# Altium PCB MiniRobot.PcbDoc
Units mm, origin at the board's own origin, x right, y up, seen from the top; angles counter-clockwise.
Board outline 90 x 85 mm, 2 copper layers (Top Layer, Bottom Layer); 55 components, 49 nets, 199 pads, 4 vias.
Unrouted connection lines stored in the file: 90.
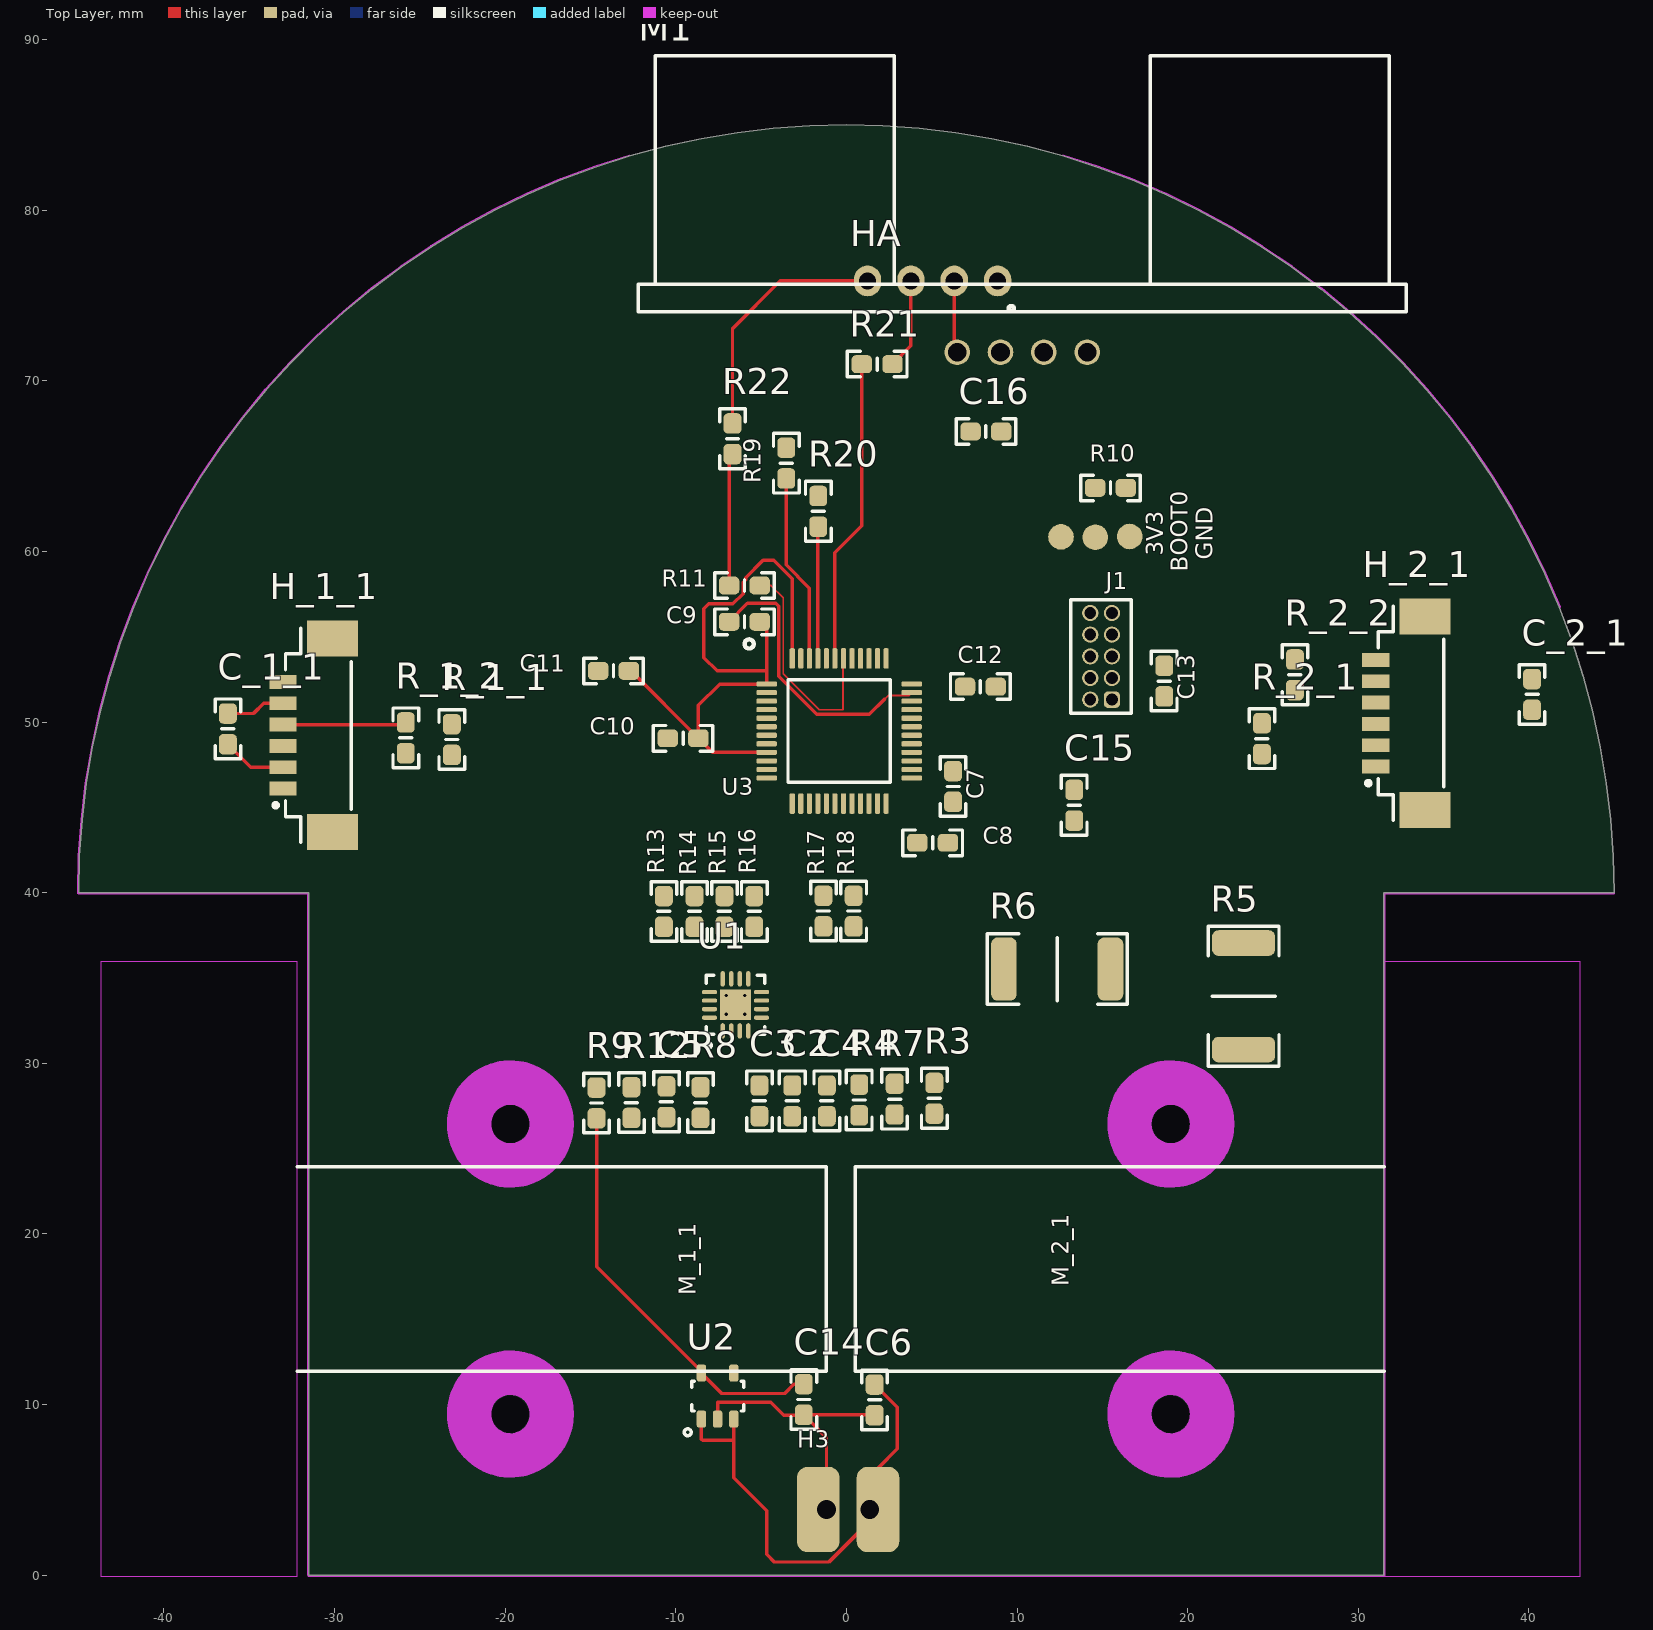
[diagram p0: Top Layer view]
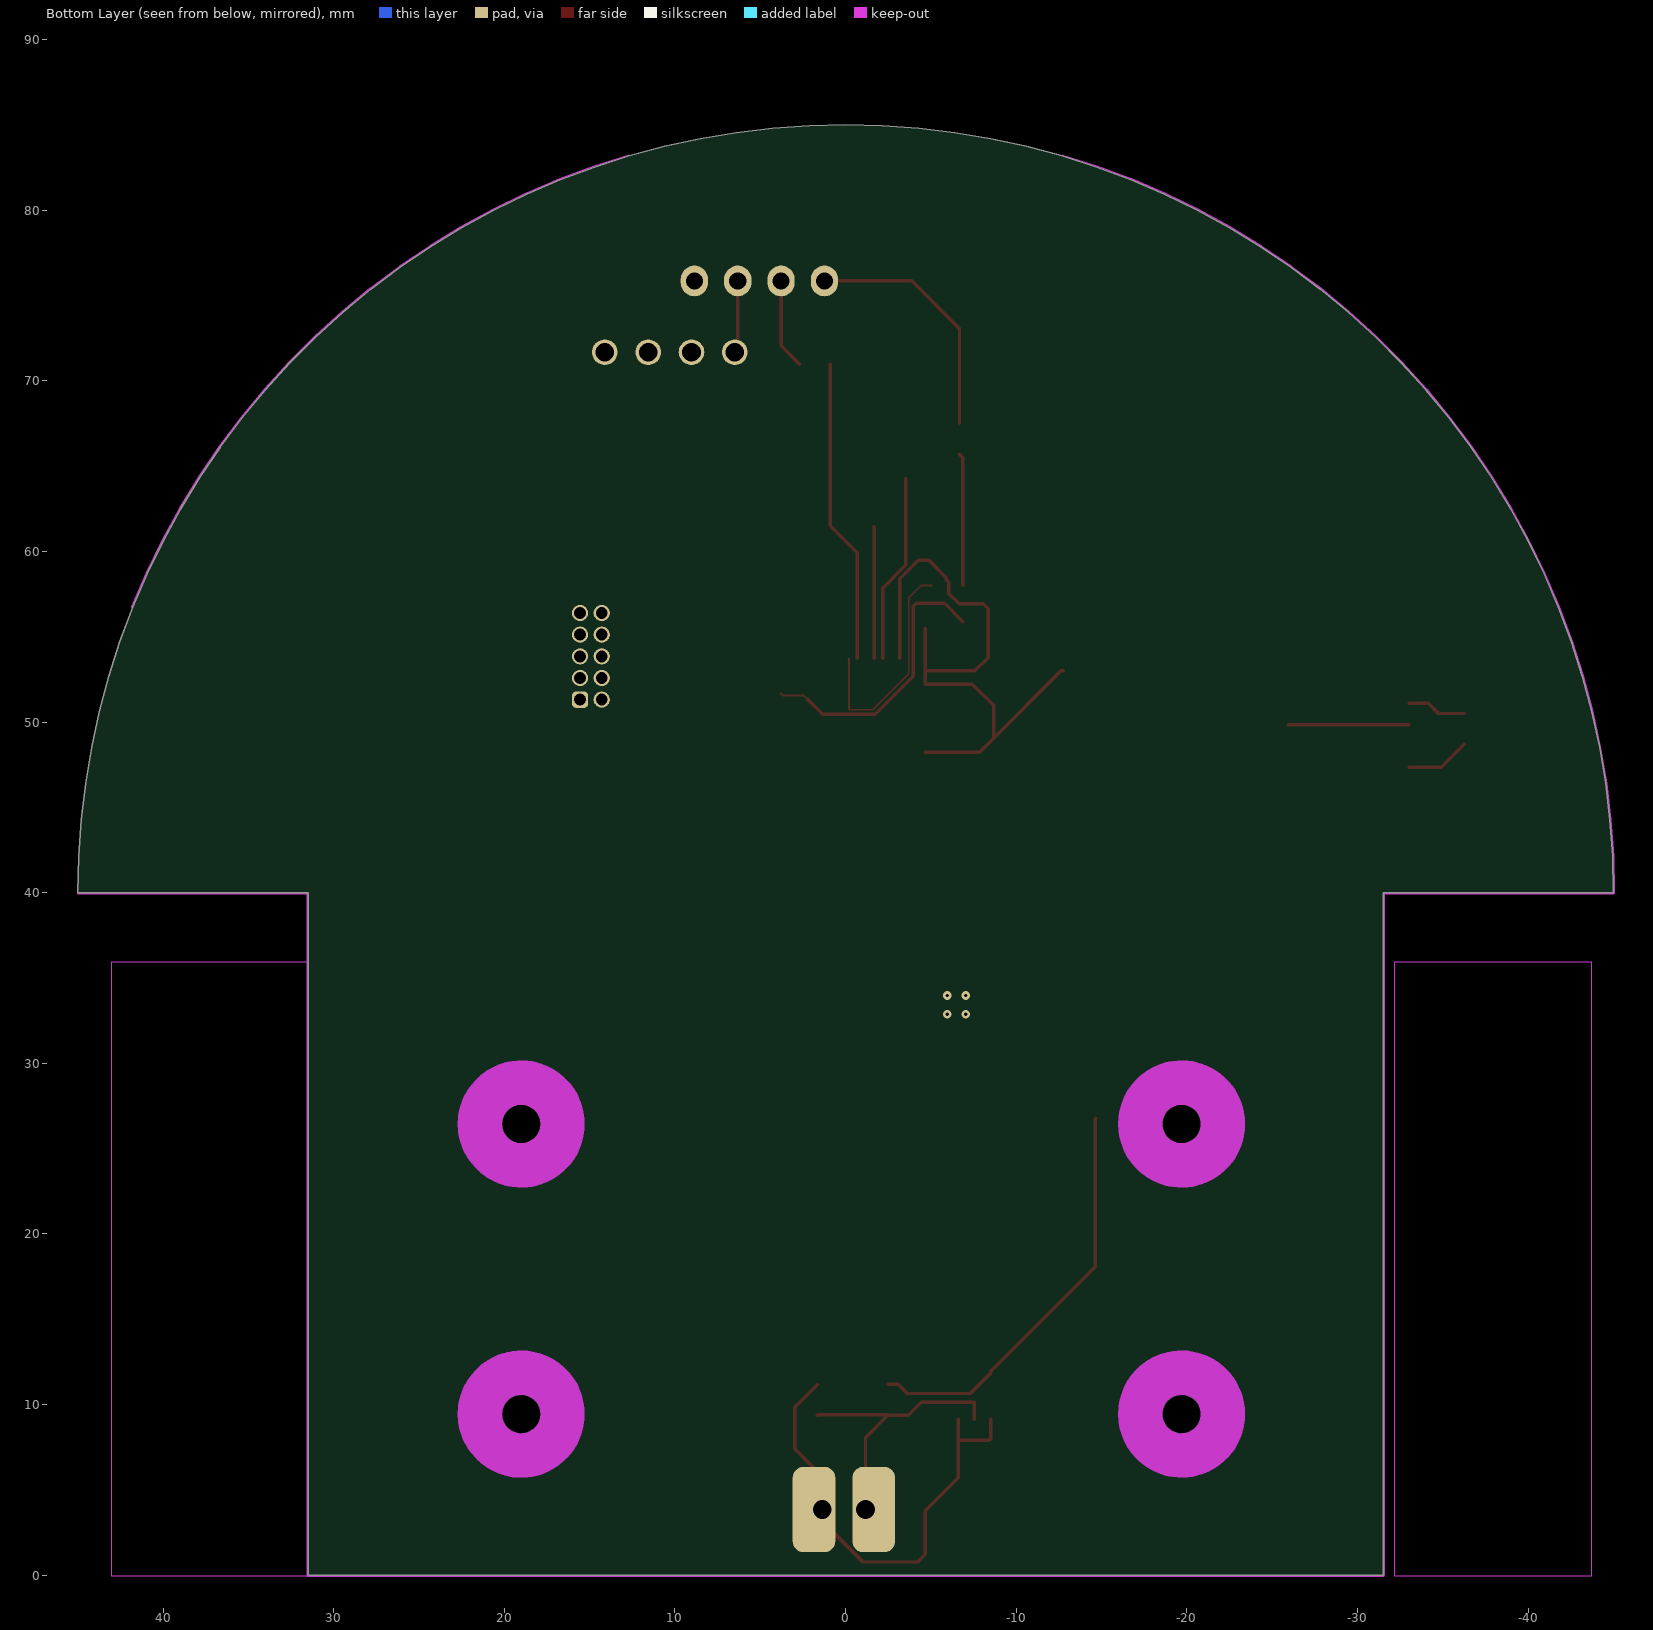
[diagram p1: Bottom Layer view, seen from below]

## Layer stack, top to bottom
Top Solder: solder mask 0.0102, Solder Resist, Dk 3.5
Top Layer: signal copper 0.0356
Dielectric 1: dielectric 0.32, FR-4, Dk 4.8
Bottom Layer: signal copper 0.0356
Bottom Solder: solder mask 0.0102, Solder Resist, Dk 3.5

## Board outline
45,40 44.949,42.141 44.796,44.278 44.542,46.404 44.187,48.516 43.732,50.609 43.177,52.678 42.525,54.718 41.777,56.725 40.933,58.694 39.998,60.62 38.971,62.5 37.856,64.329 36.656,66.103 35.372,67.817 34.009,69.469 32.568,71.054 31.054,72.568 29.469,74.009 27.817,75.372 26.103,76.656 24.329,77.856 22.5,78.971 20.62,79.998 18.694,80.933 16.725,81.777 14.718,82.525 12.678,83.177 10.609,83.732 8.516,84.187 6.404,84.542 4.278,84.796 2.141,84.949 0,85 -2.141,84.949 -4.278,84.796 -6.404,84.542 -8.516,84.187 -10.609,83.732 -12.678,83.177 -14.718,82.525 -16.725,81.777 -18.694,80.933 -20.62,79.998 -22.5,78.971 -24.329,77.856 -26.103,76.656 -27.817,75.372 -29.469,74.009 -31.054,72.568 -32.568,71.054 -34.009,69.469 -35.372,67.817 -36.656,66.103 -37.856,64.329 -38.971,62.5 -39.998,60.62 -40.933,58.694 -41.777,56.725 -42.525,54.718 -43.177,52.678 -43.732,50.609 -44.187,48.516 -44.542,46.404 -44.796,44.278 -44.949,42.141 -45,40 -31.5,40 -31.5,0 31.5,0 31.5,40

## Design rules (kind name [scope] priority, off if disabled: settings)
Clearance [All] p1: gap=0.125
ComponentClearance [All] p1 off: gap=0.254 collisioncheckmode=3 verticalgap=0.254 showdistances=FALSE
HoleSize [All] p1: absolutevalues=TRUE maxlimit=10 minlimit=0.19 maxpercent=80.000 minpercent=20.000
MinimumAnnularRing [All] p1: minimumring=0.076
MinimumSolderMaskSliver [All] p1: minsoldermaskwidth=0.154
PolygonConnect [All] p1: connectstyle=Relief reliefconductorwidth=0.254 reliefentries=4 polygonreliefangle="45 Angle" airgapwidth=0.254
RoomDefinition U_MR_UartConnector [InComponentClass('U_MR_UartConnector')] p1: confinementstyle=ConfineIn formatcopy=TRUE lockcomponents=FALSE outline 46.142,67.855 66.368,67.855 66.368,80.855 46.142,80.855
RoomDefinition U_MR_RangeSensor [InComponentClass('U_MR_RangeSensor')] p2: confinementstyle=ConfineIn formatcopy=TRUE lockcomponents=FALSE outline 53.035,65.225 53.035,35.174 101.312,35.174 101.312,65.225
RoomDefinition U_MR_Power [InComponentClass('U_MR_Power')] p3: confinementstyle=ConfineIn formatcopy=TRUE lockcomponents=FALSE outline 48.917,8.552 64.143,8.552 64.143,15.077 48.917,15.077
RoomDefinition U_MR_Motor_Control [InComponentClass('U_MR_Motor_Control')] p4: confinementstyle=ConfineIn formatcopy=TRUE lockcomponents=FALSE outline 47.992,-5.099 113.67,-5.099 113.67,2.727 47.992,2.727
RoomDefinition RightMotor [InComponentClass('RightMotor')] p5: confinementstyle=ConfineIn formatcopy=TRUE lockcomponents=FALSE outline 45.65,100.324 78.702,100.324 78.702,117.3 45.65,117.3
RoomDefinition LeftMotor [InComponentClass('LeftMotor')] p6: confinementstyle=ConfineIn formatcopy=TRUE lockcomponents=FALSE outline 45.95,82.074 77.977,82.074 77.977,99.05 45.95,99.05
RoutingVias [All] p1: holewidth=0.25 width=0.6 viastyle="Through Hole" minholewidth=0.2 minwidth=0.45 maxholewidth=1 maxwidth=2
SilkToSilkClearance [All] p1: silktosilkclearance=0.154
SilkToSolderMaskClearance [IsPad] p1: minsilkscreentomaskgap=0 clearancetoexposedcopper=TRUE
SolderMaskExpansion SolderMask_Via [IsVia] p1: expansion=-100
SolderMaskExpansion [All] p2: expansion=0.102
Width [All] p1: maxlimit=10 minlimit=0.075 preferedwidth=0.2 minimp=50.000000 maximp=50.000000 favimp=50.000000
24 further rules are at their usual default settings.

## Classes and differential pairs
component class U_MR_UartConnector: C16 HA R21 R22
component class U_MR_RangeSensor: C15 M1 R20
component class U_MR_Motor_Control: C2 C3 C4 C5 R3 R4 R5 R6 R7 R8 R9 R12 U1
channel class MR_Motor: LeftMotor RightMotor
component class U_MR_Power: C6 C14 H3 U2
component class RightMotor: C_2_1 H_2_1 M_2_1 R_2_1 R_2_2
component class LeftMotor: C_1_1 H_1_1 M_1_1 R_1_1 R_1_2
component class U_MR_Mcu: 3V3 BOOT0 C7 C8 C9 C10 C11 C12 C13 GND J1 R10 R11 R13 R14 R15 R16 R17 R18 R19 U3

## Components (designator, comment, footprint, x,y, rotation, side; value= is the part's Value field where it differs from the comment)
3V3 "TestPoint" ROUND_TEST_POINT 12.575,60.85 r180 top
BOOT0 "TestPoint" ROUND_TEST_POINT 14.588,60.825 r270 top
C2 "CerCap" 0603_CAP_LD -3.175,27.8 r90 top
C3 "CerCap" 0603_CAP_LD -5.1,27.8 r270 top
C4 "CerCap" 0603_CAP_LD -1.15,27.8 r270 top
C5 "CerCap" 0603_CAP_LD -10.55,27.75 r90 top
C6 "CerCap" 0603_CAP_LD 1.65,10.275 r90 top
C7 "CerCap" 0603_CAP_LD 6.25,46.225 r270 top
C8 "CerCap" 0603_CAP_LD 5.05,42.925 r180 top
C9 "CerCap" 0603_CAP_LD -5.975,55.875 r0 top
C10 "CerCap" 0603_CAP_LD -9.575,49.05 r0 top
C11 "CerCap" 0603_CAP_LD -13.65,53 r0 top
C12 "CerCap" 0603_CAP_LD 7.85,52.075 r180 top
C13 "CerCap" 0603_CAP_LD 18.625,52.4 r270 top
C14 "CerCap" 0603_CAP_LD -2.5,10.3 r90 top
C15 "CerCap" 0603_CAP_LD 13.35,45.125 r90 top
C16 "CerCap" 0603_CAP_LD 8.175,67.025 r0 top
C_1_1 "CerCap" 0603_CAP_LD -36.25,49.6 r90 top (schematic designator C1)
C_2_1 "CerCap" 0603_CAP_LD 40.183,51.618 r90 top (schematic designator C1)
GND "TestPoint" ROUND_TEST_POINT 16.6,60.875 r90 top
H3 "CustomBatteryConnector" CUSTOMBATTERYCONNECTOR 0.1,3.85 r180 top
H_1_1 "Header" HEADER_1X6_PICOBLADE_653106124022 -30.95,49.225 r90 top (schematic designator H1)
H_2_1 "Header" HEADER_1X6_PICOBLADE_653106124022 33.083,50.518 r90 top (schematic designator H1)
HA "Header" "HE14 1x4 Straight" 5.05,75.85 r180 top
J1 "Debug" 62201021121 14.925,53.85 r90 top
M1 "Ultrasonic Range Sensor" HC-SR04 10.3,71.675 r0 top
M_1_1 "MotorGroup" MOTORGROUP -1.192,17.944 r0 top locked (schematic designator M1)
M_2_1 "MotorGroup" MOTORGROUP 0.508,17.943 r180 top locked (schematic designator M1)
R3 "Resistor" 0603_RES_LD 5.15,27.95 r270 top
R4 "Resistor" 0603_RES_LD 0.75,27.85 r270 top
R5 "Resistor" 2512_RES_LD 23.275,33.925 r270 top
R6 "Resistor" 2512_RES_LD 12.35,35.525 r180 top
R7 "Resistor" 0603_RES_LD 2.825,27.9 r270 top
R8 "Resistor" 0603_RES_LD -8.55,27.7 r90 top
R9 "Resistor" 0603_RES_LD -14.65,27.675 r270 top
R10 "Resistor" 0603_RES_LD 15.475,63.725 r180 top
R11 "Resistor" 0603_RES_LD -5.975,58 r0 top
R12 "Resistor" 0603_RES_LD -12.6,27.7 r90 top
R13 "Resistor" 0603_RES_LD -10.7,38.9 r90 top
R14 "Resistor" 0603_RES_LD -8.9,38.9 r90 top
R15 "Resistor" 0603_RES_LD -7.15,38.9 r90 top
R16 "Resistor" 0603_RES_LD -5.4,38.9 r90 top
R17 "Resistor" 0603_RES_LD -1.35,38.925 r90 top
R18 "Resistor" 0603_RES_LD 0.425,38.925 r90 top
R19 "Resistor" 0603_RES_LD -3.525,65.175 r270 top
R20 "Resistor" 0603_RES_LD -1.65,62.35 r90 top
R21 "Resistor" 0603_RES_LD 1.8,70.975 r0 top
R22 "Resistor" 0603_RES_LD -6.675,66.6 r90 top
R_1_1 "Resistor" 0603_RES_LD -23.125,48.975 r90 top (schematic designator R1)
R_1_2 "Resistor" 0603_RES_LD -25.825,49.075 r90 top (schematic designator R2)
R_2_1 "Resistor" 0603_RES_LD 24.35,49.025 r90 top (schematic designator R1)
R_2_2 "Resistor" 0603_RES_LD 26.283,52.768 r270 top (schematic designator R2)
U1 "Dual Brush Motor Driver" QFN-STSPIN240 -6.5,33.425 r90 top
U2 "Low noise, Low Iq LDO" LP5907 -7.55,10.5 r90 top
U3 "Microcontroller" STM32_LQFP48 -0.425,49.475 r0 top

## Footprints (in the part's own frame and the unit in brackets; to place one, negate y for a bottom-side part, rotate by r counter-clockwise, add the part's x,y. Pads: shape width x height; smd on the part's side, far side on the other; paste and mask are expansions set on the pad)
0603_CAP_LD [mm] "0603 Capacitor Low Density"
  rrect50% 1.2x1.05 smd: 1(-0.9,0) 2(0.9,0)
  silkscreen extent -1.75,-0.75 1.75,0.75, body extent -0.85,-0.45 0.85,0.45, height 0.55
0603_RES_LD [mm] "0603 Resistor Low Density"
  rrect50% 1.2x1.05 smd: 1(-0.9,0) 2(0.9,0)
  silkscreen extent -1.75,-0.75 1.75,0.75, body extent -0.85,-0.45 0.85,0.45, height 0.55
2512_RES_LD [mm] "2512 Low Density Resistor"
  rrect50% 1.5x3.7 smd: 1(-3.125,0) 2(3.125,0)
  silkscreen extent -4.1,-2.07 4.1,2.07
62201021121 [mm] "Pin Header, pitch 1.27 mm, THT, Vertical, dual row, 10p"
  rrect50% 0.95x0.95 hole 0.7: 1(-2.54,-0.635)
  round 0.95 hole 0.7: 2(-2.54,0.635) 3(-1.27,-0.635) 4(-1.27,0.635) 5(0,-0.635) 6(0,0.635) 7(1.27,-0.635) 8(1.27,0.635) 9(2.54,-0.635) 10(2.54,0.635)
  silkscreen extent -3.32,-1.78 3.32,1.78, body extent -3.17,-1.7 3.18,1.7, height 5.33
CUSTOMBATTERYCONNECTOR [mm] "CustomBatteryConnector"
  rrect50% 2.5x5 smd paste-100: +(-1.75,0) -(1.75,0)
  rrect50% 2.5x5 smd far side paste-100: +(-1.75,0) -(1.75,0)
  round 1.5 hole 1.1 unplated paste-100: +(-1.27,0) -(1.27,0)
HC-SR04 [mm] "HC-SR04"
  round 1.5 hole 1.1 unplated: 1(-3.81,0) 2(-1.27,0) 3(1.27,0) 4(3.81,0)
  silkscreen extent -22.5,2.38 22.5,17.38, body extent -22.72,-0.3 22.72,17.49, height 20
"HE14 1x4 Straight" [mm] "Connector HE14 Straight 1x4"
  oval 1.6x1.8 hole 1 mask+0.102: 1(-3.81,0) 2(-1.27,0) 3(1.27,0) 4(3.81,0)
  silkscreen extent -4.77,1.47 -4.45,1.78, body extent -5.08,-1.27 5.08,1.27, height 9.5
HEADER_1X6_PICOBLADE_653106124022 [mm] "1.25mm SMT Male Vertical Shrouded Header, 6p"
  rect 0.81x1.6 smd: 1(-3.125,2.07) 2(-1.875,2.07) 3(-0.625,2.07) 4(0.625,2.07) 5(1.875,2.07) 6(3.125,2.07)
  rect 2.1x3 smd: ""(-5.675,-0.83) ""(5.675,-0.83)
  silkscreen extent -6.27,-1.92 6.27,2.62, body extent -6.22,-1.85 6.22,2.35, height 4.74
LP5907 [mm] "LP5907 SOT23"
  rrect50% 1x0.55 smd mask+0.102: 1(-1.35,0.95) 2(-1.35,0) 3(-1.35,-0.95) 4(1.35,-0.95) 5(1.35,0.95)
  silkscreen extent -2.33,-1.52 0.88,1.95
MOTORGROUP [mm]
  round 0 hole 2.2 unplated paste+0 mask+0: 21(-18.5,8.5) 22(-18.5,-8.5)
  Keep-Out Layer pour cut-out: -31,-18 -31,18 -42.5,18 -42.5,-18
  Keep-Out Layer circle w2.6: c-18.5,8.5 r2.425
  Keep-Out Layer circle w2.6: c-18.5,-8.5 r2.425
  silkscreen extent -31,-6 0,6
QFN-STSPIN240 [mm] "QFN, 16-Leads, Body 3,00x3,00mm, Pitch 0,50mm, Thermal Pad 1,80x1,80mm, IPC Low Density"
  oval 0.9x0.25 smd: 1(-1.525,0.75) 2(-1.525,0.25) 3(-1.525,-0.25) 4(-1.525,-0.75) 9(1.525,-0.75) 10(1.525,-0.25) 11(1.525,0.25) 12(1.525,0.75)
  oval 0.25x0.9 smd: 5(-0.75,-1.525) 6(-0.25,-1.525) 7(0.25,-1.525) 8(0.75,-1.525) 13(0.75,1.525) 14(0.25,1.525) 15(-0.25,1.525) 16(-0.75,1.525)
  rect 1.8x1.8 smd: 17(0,0)
  silkscreen extent -2.5,-1.73 1.73,1.73, body extent -1.58,-1.57 1.57,1.58, height 1
ROUND_TEST_POINT [mm] "Small round test point"
  round 1.5 smd paste-100: 1(0,0)
STM32_LQFP48 [mm]
  rrect50% 1.2x0.3 smd: 1(-4.25,2.75) 2(-4.25,2.25) 3(-4.25,1.75) 4(-4.25,1.25) 5(-4.25,0.75) 6(-4.25,0.25) 7(-4.25,-0.25) 8(-4.25,-0.75) 9(-4.25,-1.25) 10(-4.25,-1.75) 11(-4.25,-2.25) 12(-4.25,-2.75) 25(4.25,-2.75) 26(4.25,-2.25) 27(4.25,-1.75) 28(4.25,-1.25) 29(4.25,-0.75) 30(4.25,-0.25) 31(4.25,0.25) 32(4.25,0.75) 33(4.25,1.25) 34(4.25,1.75) 35(4.25,2.25) 36(4.25,2.75)
  rrect50% 0.3x1.2 smd: 13(-2.75,-4.25) 14(-2.25,-4.25) 15(-1.75,-4.25) 16(-1.25,-4.25) 17(-0.75,-4.25) 18(-0.25,-4.25) 19(0.25,-4.25) 20(0.75,-4.25) 21(1.25,-4.25) 22(1.75,-4.25) 23(2.25,-4.25) 24(2.75,-4.25) 37(2.75,4.25) 38(2.25,4.25) 39(1.75,4.25) 40(1.25,4.25) 41(0.75,4.25) 42(0.25,4.25) 43(-0.25,4.25) 44(-0.75,4.25) 45(-1.25,4.25) 46(-1.75,4.25) 47(-2.25,4.25) 48(-2.75,4.25)
  silkscreen extent -5.54,-3 3,5.37

## Part data
C2 C3 C4 C5 C6 C7 C8 C9 C10 C11 C12 C13 C14 C15 C16 C_1_1 C_2_1: "Ceramic Capacitor"
H3: library part BatteryConnector, "Custom Battery Connector"
H_1_1 H_2_1: library part Header_6x1, "Header 6x1 Pins"
HA: library part Header_4x1, "Header 4x1 PIns"
J1: library part Cortex_10x2, "Cortex 10 pins Debug Connector"
M1: library part HC-SR04
M_1_1 M_2_1: library part Motor
U1: library part STSPIN240, "ST Dual Motor Driver"
U2: library part LP5907, "LP5907 Low Noise Low Iq LDO"
U3: library part STM32F303CBT6, "STM32F303 Microcontroller"

## Via types
v1: diameter 0.5, hole 0.2, Top Layer to Bottom Layer, 4 vias

## Nets (pads, with @x,y where several pads share a name; then routed paths per layer and width w, separated by ;. In a path a pad name is that pad's centre, name@x,y a point inside that pad or via, vN(x,y) a via of type N, cw(c..) or ccw(c..) an arc to the next point about the centre after c; other vN are vias at no path point)
3V3: 3V3.1 C7.2 C8.2 C9.2 C10.2 C11.2 C12.2 C13.2 C14.2 J1.1 M1.4 R9.2 U2.5 U3.1 U3.9 U3.24 U3.36 U3.48 | length 62.7
  Top Layer w0.2: R9.2 -14.625,26.75 -14.625,18.075 -8.5,11.95 U2.5 -7.3,10.65 -3.625,10.65 -3.075,11.2 C14.2 ; C11.2 -12.625,53 C10.2 ; U3.9 -7.85,48.225 C10.2 ; C9.2@-4.675,55.475 -4.675,53 ; U3.48 -3.175,58.4 -4.25,59.475 -4.889,59.475 -5.9,58.464 -5.9,58.35 -6.05,58.2 -6.05,57.525 -6.65,56.925 -8.075,56.925 -8.35,56.65 -8.35,53.775 -7.575,53 -4.675,53 ; C10.2 -8.675,50.975 -7.425,52.225 U3.1 -4.675,53
BOOT0: BOOT0.1 R10.2 U3.44
GND: C2.1 C3.2 C4.2 C5.1 C6.1 C7.1 C8.1 C9.1 C10.1 C11.1 C12.1 C13.1 C14.1 C15.2 C16.1 C_1_1.1 C_2_1.1 GND.1 H3.- H_1_1.2 H_2_1.2 HA.2 J1.3 J1.5 J1.9 M1.1 R5.1 R6.1 R8.1 R10.1 R12.1 U1.7 U2.2 U3.8 U3.23 U3.35 U3.47 | length 41.4
  Top Layer w0.1: 2.25,51.35 2.45,51.55 3.65,51.55 U3.35
  Top Layer w0.2: C_1_1.1 -34.9,47.35 H_1_1.2 ; U2.2 -7.55,10.125 -4.425,10.125 -3.675,9.375 -2.525,9.375 C14.1 ; C9.1 -5.8,56.95 -4.15,56.95 -3.975,56.775 -3.975,52.675 -1.75,50.45 1.35,50.45 2.25,51.35 ; H3.-@-1.17,3.85 -1.17,8.07 C14.1 ; C6.1 1.625,9.4 C14.1 ; HA.2 6.32,71.845 M1.1
NetC3_1: C3.1 R3.2 U1.13 U3.20
NetC5_2: C5.2 R7.1
NetH_1_1_1: H_1_1.1 U1.3
NetH_1_1_3: H_1_1.3 R_1_1.2
NetH_1_1_4: H_1_1.4 R_1_2.2 | length 7.1
  Top Layer w0.2: H_1_1.4 R_1_2.2@-25.95,49.85
NetH_1_1_6: H_1_1.6 U1.5
NetH_2_1_1: H_2_1.1 U1.10
NetH_2_1_3: H_2_1.3 R_2_1.2
NetH_2_1_4: H_2_1.4 R_2_2.2
NetH_2_1_6: H_2_1.6 U1.8
NetHA_3: HA.3 R21.2 | length 5.3
  Top Layer w0.2: R21.2 3.78,72.055 HA.3
NetHA_4: HA.4 R22.2 | length 14.6
  Top Layer w0.2: R22.2 -6.675,73.05 -3.875,75.85 HA.4
NetM1_2: M1.2 R20.2
NetM1_3: M1.3 R19.1
NetR3_1: R3.1 R18.1
NetR4_2: R4.2 R17.1
NetR5_2: R5.2 U1.9
NetR6_2: R6.2 U1.4
NetR7_2: R7.2 R8.2 U1.12
NetR9_1: R9.1 R12.2 U1.11
NetR11_1: R11.1 R22.1 | length 7.8
  Top Layer w0.2: R11.1 -6.875,65.5 R22.1
NetR11_2: R11.2 U3.42 | length 13.5
  Top Layer w0.1: R11.2 -4.425,58 -3.7,57.275 -3.7,52.825 -1.6,50.725 -0.2,50.725 -0.2,53.7 U3.42
NetR13_1: R13.1 U1.2
NetR13_2: R13.2 U3.12
NetR14_1: R14.1 U1.16
NetR14_2: R14.2 U3.13
NetR15_1: R15.1 U1.1
NetR15_2: R15.2 U3.14
NetR16_1: R16.1 U1.15
NetR16_2: R16.2 U3.15
NetR17_2: R17.2 U3.18
NetR18_2: R18.2 U3.19
NetR19_2: R19.2 U3.46 | length 11.1
  Top Layer w0.2: R19.2 -3.525,59.21 -2.85,58.535 -2.85,58.525 -2.175,57.85 U3.46
NetR20_1: R20.1 U3.45 | length 7.7
  Top Layer w0.2: U3.45 -1.675,61.425 R20.1
NetR21_1: R21.1 U3.43 | length 17.9
  Top Layer w0.2: U3.43 -0.675,59.925 0.9,61.5 R21.1
NetR_1_1_1: R_1_1.1 U3.10
NetR_1_2_1: R_1_2.1 U3.11
NetR_2_1_1: R_2_1.1 U3.16
NetR_2_2_1: R_2_2.1 U3.17
nRST: J1.10 U3.7
SWCLK: J1.4 U3.37
SWDIO: J1.2 U3.34
SWO: J1.6 U3.39
VBATT: C6.2 C16.2 C_1_1.2 C_2_1.2 H3.+ H_1_1.5 H_2_1.5 HA.1 U1.6 U2.1 U2.3 | length 32.2
  Top Layer w0.2: C_1_1.2 -34.75,50.5 -34.15,51.1 H_1_1.5 ; U2.1 -8.5,7.975 -8.425,7.9 -6.6,7.9 ; U2.3 -6.6,7.9 ; H3.+@1.37,3.85 H3.+@1.85,3.85 ; C6.2 2.975,9.85 2.975,7.4 1.85,6.275 H3.+@1.85,3.85 ; -6.6,7.9 -6.6,5.7 -4.675,3.775 -4.675,1.225 -4.225,0.775 -1.023,0.775 1.85,3.648 H3.+@1.85,3.85
VCC: C2.2 C15.1
VDD: C4.1 R4.1 U1.14
pads on no net: H_1_1. H_2_1. J1.7 J1.8 M_1_1.21 M_1_1.22 M_2_1.21 M_2_1.22 U1.17 U2.4 U3.2 U3.3 U3.4 U3.5 U3.6 U3.21 U3.22 U3.25 U3.26 U3.27 U3.28 U3.29 U3.30 U3.31 U3.32 U3.33 U3.38 U3.40 U3.41
copper on no net:
  other v1: -7.05,32.875 -5.95,32.875 -7.05,33.975 -5.95,33.975

## Keep-outs
Keep-Out Layer:
  lines w0.1: -12.693,83.225 -14.733,82.573 ; 12.693,83.225 14.733,82.573 ; 41.823,56.745 40.979,58.713 ; 45,39.95 31.55,39.95 31.55,0 ; -45.05,40.001 ccw(c-45,40) -45,39.95 ; -45.05,40.002 ccw(c-45,40) -45,39.95 ; -45.05,40.002 -44.999,42.142 ; -45.05,40.001 -45.05,40.002 ; -45,39.95 -31.55,39.95 -31.55,0 ; -44.999,42.142 cw(c-44.949,42.141) -44.999,42.145 ; -44.999,42.142 cw(c-44.949,42.141) -44.999,42.145 ; -44.999,42.142 -44.999,42.142 ; -44.999,42.145 -44.846,44.281 ; -44.846,44.281 cw(c-44.796,44.278) -44.846,44.283 ; -44.846,44.281 cw(c-44.796,44.278) -44.846,44.283 ; -44.846,44.283 -44.592,46.41 ; -44.592,46.41 cw(c-44.542,46.404) -44.591,46.413 ; -44.592,46.41 cw(c-44.542,46.404) -44.591,46.412 ; -44.591,46.413 -44.236,48.524 ; -44.591,46.412 -44.591,46.413 ; -44.236,48.525 cw(c-44.187,48.516) -44.236,48.527 ; -44.236,48.524 cw(c-44.187,48.516) -44.236,48.527 ; -44.236,48.524 -44.236,48.525 ; -44.236,48.527 ccw(c-44.187,48.516) -44.236,48.527 ; -44.236,48.527 -43.78,50.62 ; -44.236,48.527 -44.236,48.527 ; -44.236,48.527 -44.236,48.527 ; -43.78,50.62 cw(c-43.732,50.609) -43.78,50.622 ; -43.78,50.62 ccw(c-43.732,50.609) -43.78,50.62 ; -43.78,50.62 cw(c-43.732,50.609) -43.78,50.622 ; -43.78,50.62 -43.78,50.62 ; -43.78,50.62 -43.78,50.62 ; -43.78,50.622 ccw(c-43.732,50.609) -43.78,50.622 ; -43.78,50.622 -43.226,52.691 ; -43.78,50.622 -43.78,50.622 ; -43.78,50.622 -43.78,50.622 ; -43.226,52.691 cw(c-43.177,52.678) -43.225,52.693 ; -43.226,52.691 ccw(c-43.177,52.678) -43.226,52.691 ; -43.226,52.691 cw(c-43.177,52.678) -43.225,52.693 ; -43.226,52.691 -43.226,52.691 ; -43.226,52.691 -43.226,52.691 ; -43.225,52.693 -42.573,54.733 ; -42.573,54.733 cw(c-42.525,54.718) -42.572,54.735 ; -42.573,54.733 cw(c-42.525,54.718) -42.572,54.736 ; -42.572,54.736 ccw(c-42.525,54.718) -42.572,54.735 ; -42.572,54.736 -41.824,56.742 ; -42.572,54.736 -42.572,54.736 ; -42.572,54.735 -42.572,54.736 ; -41.823,56.742 cw(c-41.777,56.725) -41.823,56.744 ; -41.823,56.742 ccw(c-41.777,56.725) -41.823,56.742 ; -41.823,56.742 cw(c-41.777,56.725) -41.823,56.744 ; -41.823,56.742 -41.823,56.742 ; -41.824,56.742 -41.823,56.742 ; -41.823,56.744 -40.979,58.713 ; -40.979,58.713 cw(c-40.933,58.694) -40.979,58.715 ; -40.979,58.713 cw(c-40.933,58.694) -40.978,58.716 ; -40.979,58.715 cw(c-40.933,58.694) -40.978,58.716 ; -40.979,58.715 -40.978,58.716 ; -40.978,58.716 -40.043,60.642 ; -40.978,58.716 -40.978,58.716 ; -40.043,60.642 cw(c-39.998,60.62) -40.042,60.644 ; -40.043,60.642 cw(c-39.998,60.62) -40.043,60.642 ; -40.043,60.642 -40.043,60.642 ; -40.043,60.642 -40.043,60.642 ; -40.043,60.642 cw(c-39.998,60.62) -40.042,60.644 ; -40.042,60.644 -39.015,62.524 ; -39.015,62.524 cw(c-38.971,62.5) -39.014,62.526 ; -39.015,62.524 cw(c-38.971,62.5) -39.014,62.526 ; -39.014,62.526 -37.899,64.355 ; -37.899,64.355 cw(c-37.856,64.329) -37.898,64.357 ; -37.899,64.355 cw(c-37.856,64.329) -37.898,64.357 ; -37.898,64.357 -36.698,66.13 ; -37.898,64.357 -37.898,64.357 ; -36.697,66.131 cw(c-36.656,66.103) -36.696,66.133 ; -36.698,66.13 cw(c-36.656,66.103) -36.696,66.133 ; -36.698,66.13 -36.697,66.131 ; -36.696,66.133 -35.412,67.847 ; -35.412,67.847 cw(c-35.372,67.817) -35.411,67.849 ; -35.412,67.847 cw(c-35.372,67.817) -35.411,67.849 ; -35.411,67.849 -34.047,69.501 ; -34.047,69.501 cw(c-34.009,69.469) -34.046,69.502 ; -34.047,69.501 cw(c-34.009,69.469) -34.046,69.502 ; -34.046,69.503 ccw(c-34.009,69.469) -34.046,69.502 ; -34.046,69.503 -32.605,71.087 ; -34.046,69.502 -34.046,69.503 ; -34.046,69.502 -34.046,69.502 ; -32.605,71.087 cw(c-32.568,71.054) -32.603,71.089 ; -32.605,71.087 ccw(c-32.568,71.054) -32.605,71.087 ; -32.605,71.087 cw(c-32.568,71.054) -32.603,71.089 ; -32.605,71.087 -32.605,71.087 ; -32.605,71.087 -32.605,71.087 ; -32.603,71.089 -31.089,72.603 ; -31.55,0 ccw(c-31.5,0) -31.5,-0.05 ; -31.55,0 ccw(c-31.5,0) -31.5,-0.05 ; -31.5,-0.05 31.5,-0.05 ; -31.089,72.603 cw(c-31.054,72.568) -31.087,72.605 ; -31.089,72.603 cw(c-31.054,72.568) -31.087,72.605 ; -31.087,72.605 ccw(c-31.054,72.568) -31.087,72.605 ; -31.087,72.605 -29.503,74.046 ; -31.087,72.605 -31.087,72.605 ; -31.087,72.605 -31.087,72.605 ; -29.503,74.046 cw(c-29.469,74.009) -29.502,74.046 ; -29.503,74.046 -29.502,74.046 ; -29.502,74.046 cw(c-29.469,74.009) -29.501,74.047 ; -29.502,74.046 cw(c-29.469,74.009) -29.501,74.047 ; -29.502,74.046 -29.502,74.046 ; -29.501,74.047 -27.849,75.411 ; -27.849,75.411 cw(c-27.817,75.372) -27.847,75.412 ; -27.849,75.411 cw(c-27.817,75.372) -27.847,75.412 ; -27.847,75.412 -26.133,76.696 ; -26.133,76.696 cw(c-26.103,76.656) -26.13,76.698 ; -26.133,76.696 cw(c-26.103,76.656) -26.131,76.697 -26.13,76.698 ; -26.13,76.698 -24.357,77.898 ; -24.357,77.898 cw(c-24.329,77.856) -24.355,77.899 ; -24.357,77.898 cw(c-24.329,77.856) -24.355,77.899 ; -24.357,77.898 -24.357,77.898 ; -24.355,77.899 -22.526,79.014 ; -22.526,79.014 cw(c-22.5,78.971) -22.524,79.015 ; -22.526,79.014 cw(c-22.5,78.971) -22.524,79.015 ; -22.524,79.015 -20.644,80.041 ; -20.644,80.041 cw(c-20.62,79.998) -20.642,80.042 ; -20.644,80.041 cw(c-20.62,79.998) -20.642,80.043 ; -20.642,80.042 cw(c-20.62,79.998) -20.642,80.043 ; -20.642,80.043 -20.642,80.043 ; -20.642,80.042 -20.642,80.043 ; -20.642,80.043 -18.716,80.978 ; -18.716,80.978 cw(c-18.694,80.933) -18.713,80.979 ; -18.715,80.979 ccw(c-18.694,80.933) -18.716,80.978 ; -18.715,80.979 cw(c-18.694,80.933) -18.713,80.979 ; -18.716,80.978 -18.715,80.979 ; -18.716,80.978 -18.716,80.978 ; -18.713,80.979 -16.745,81.823 ; -16.745,81.823 cw(c-16.725,81.777) -16.742,81.823 ; -16.745,81.823 cw(c-16.725,81.777) -16.742,81.823 ; -16.742,81.823 cw(c-16.725,81.777) -16.742,81.823 ; -16.742,81.823 -16.742,81.823 ; -16.742,81.823 -16.742,81.823 ; -16.742,81.823 -14.736,82.572 ; -14.736,82.572 cw(c-14.718,82.525) -14.735,82.572 ; -14.736,82.572 -14.736,82.572 ; -14.736,82.572 cw(c-14.718,82.525) -14.733,82.573 ; -14.735,82.572 cw(c-14.718,82.525) -14.733,82.573 ; -14.736,82.572 -14.735,82.572 ; 14.733,82.573 cw(c14.718,82.525) 14.735,82.572 ; 14.733,82.573 cw(c14.718,82.525) 14.736,82.572 ; 14.736,82.572 ccw(c14.718,82.525) 14.735,82.572 ; 14.736,82.572 16.742,81.823 ; 14.736,82.572 14.736,82.572 ; 14.735,82.572 14.736,82.572 ; 16.742,81.823 cw(c16.725,81.777) 16.744,81.823 ; 16.742,81.823 ccw(c16.725,81.777) 16.742,81.823 ; 16.742,81.823 cw(c16.725,81.777) 16.744,81.823 ; 16.742,81.823 16.742,81.823 ; 16.742,81.823 16.742,81.823 ; 16.744,81.823 18.713,80.979 ; 18.713,80.979 cw(c18.694,80.933) 18.715,80.979 ; 18.713,80.979 cw(c18.694,80.933) 18.716,80.978 ; 18.716,80.978 ccw(c18.694,80.933) 18.715,80.979 ; 18.716,80.978 20.642,80.043 ; 18.716,80.978 18.716,80.978 ; 18.715,80.979 18.716,80.978 ; 20.642,80.042 ccw(c20.62,79.998) 20.642,80.043 ; 20.642,80.042 cw(c20.62,79.998) 20.644,80.042 ; 20.642,80.042 20.642,80.043 ; 20.642,80.043 cw(c20.62,79.998) 20.644,80.042 ; 20.642,80.043 20.642,80.043 ; 20.644,80.042 22.524,79.015 ; 22.524,79.015 cw(c22.5,78.971) 22.526,79.014 ; 22.524,79.015 cw(c22.5,78.971) 22.526,79.014 ; 22.526,79.014 24.355,77.899 ; 24.355,77.899 cw(c24.329,77.856) 24.357,77.898 ; 24.355,77.899 cw(c24.329,77.856) 24.357,77.898 ; 24.357,77.898 26.13,76.698 ; 24.357,77.898 24.357,77.898 ; 26.13,76.698 cw(c26.103,76.656) 26.133,76.696 ; 26.13,76.698 26.131,76.697 cw(c26.103,76.656) 26.133,76.696 ; 26.133,76.696 27.847,75.412 ; 27.847,75.412 cw(c27.817,75.372) 27.849,75.411 ; 27.847,75.412 cw(c27.817,75.372) 27.849,75.411 ; 27.849,75.411 29.501,74.047 ; 29.501,74.047 cw(c29.469,74.009) 29.502,74.046 ; 29.501,74.047 cw(c29.469,74.009) 29.502,74.046 ; 29.502,74.046 cw(c29.469,74.009) 29.503,74.046 ; 29.502,74.046 29.502,74.046 ; 29.503,74.046 31.087,72.605 ; 29.503,74.046 29.502,74.046 ; 31.087,72.605 cw(c31.054,72.568) 31.087,72.605 ; 31.087,72.605 31.087,72.605 ; 31.087,72.605 cw(c31.054,72.568) 31.089,72.603 ; 31.087,72.605 cw(c31.054,72.568) 31.089,72.603 ; 31.087,72.605 31.087,72.605 ; 31.089,72.603 32.603,71.089 ; 31.5,-0.05 ccw(c31.5,0) 31.55,0 ; 31.5,-0.05 ccw(c31.5,0) 31.55,0 ; 32.603,71.089 cw(c32.568,71.054) 32.605,71.087 ; 32.603,71.089 cw(c32.568,71.054) 32.605,71.087 ; 32.605,71.087 ccw(c32.568,71.054) 32.605,71.087 ; 32.605,71.087 32.605,71.087 ; 32.605,71.087 32.605,71.087 ; 32.605,71.087 34.046,69.503 ; 34.046,69.502 cw(c34.009,69.469) 34.047,69.501 ; 34.046,69.502 ccw(c34.009,69.469) 34.046,69.503 ; 34.046,69.502 cw(c34.009,69.469) 34.047,69.501 ; 34.046,69.503 34.046,69.502 ; 34.046,69.502 34.046,69.502 ; 34.047,69.501 35.411,67.849 ; 35.411,67.849 cw(c35.372,67.817) 35.412,67.847 ; 35.411,67.849 cw(c35.372,67.817) 35.412,67.847 ; 35.412,67.847 36.696,66.133 ; 36.696,66.133 cw(c36.656,66.103) 36.698,66.13 ; 36.696,66.133 cw(c36.656,66.103) 36.697,66.131 ; 36.697,66.131 36.698,66.13 ; 36.698,66.13 37.898,64.357 ; 37.898,64.357 cw(c37.856,64.329) 37.899,64.355 ; 37.898,64.357 cw(c37.856,64.329) 37.899,64.355 ; 37.898,64.357 37.898,64.357 ; 37.899,64.355 39.014,62.526 ; 39.014,62.526 cw(c38.971,62.5) 39.015,62.524 ; 39.014,62.526 cw(c38.971,62.5) 39.015,62.524 ; 39.015,62.524 40.041,60.644 ; 40.041,60.644 cw(c39.998,60.62) 40.042,60.642 ; 40.041,60.644 cw(c39.998,60.62) 40.043,60.642 ; 40.043,60.642 ccw(c39.998,60.62) 40.042,60.642 ; 40.043,60.642 40.042,60.642 ; 40.043,60.642 40.043,60.642 ; 40.043,60.642 40.978,58.716 ; 40.979,58.715 ccw(c40.933,58.694) 40.978,58.716 ; 40.979,58.715 cw(c40.933,58.694) 40.979,58.713 ; 40.979,58.715 40.978,58.716 ; 40.978,58.716 cw(c40.933,58.694) 40.979,58.713 ; 40.978,58.716 40.978,58.716

## Silkscreen, mask and mechanical layers (free items; w line width, h text height)
Mechanical 1:
  drawing of 235 lines, arcs and shapes, not listed